# Altium PCB 驱动.PcbDoc
Units mil, origin at the board's own origin, x right, y up, seen from the top; angles counter-clockwise.
Board outline 2135 x 1890 mil, 2 copper layers (Top Layer, Bottom Layer); 35 components, 26 nets, 103 pads, 5 vias.
Unrouted connection lines stored in the file: 12.
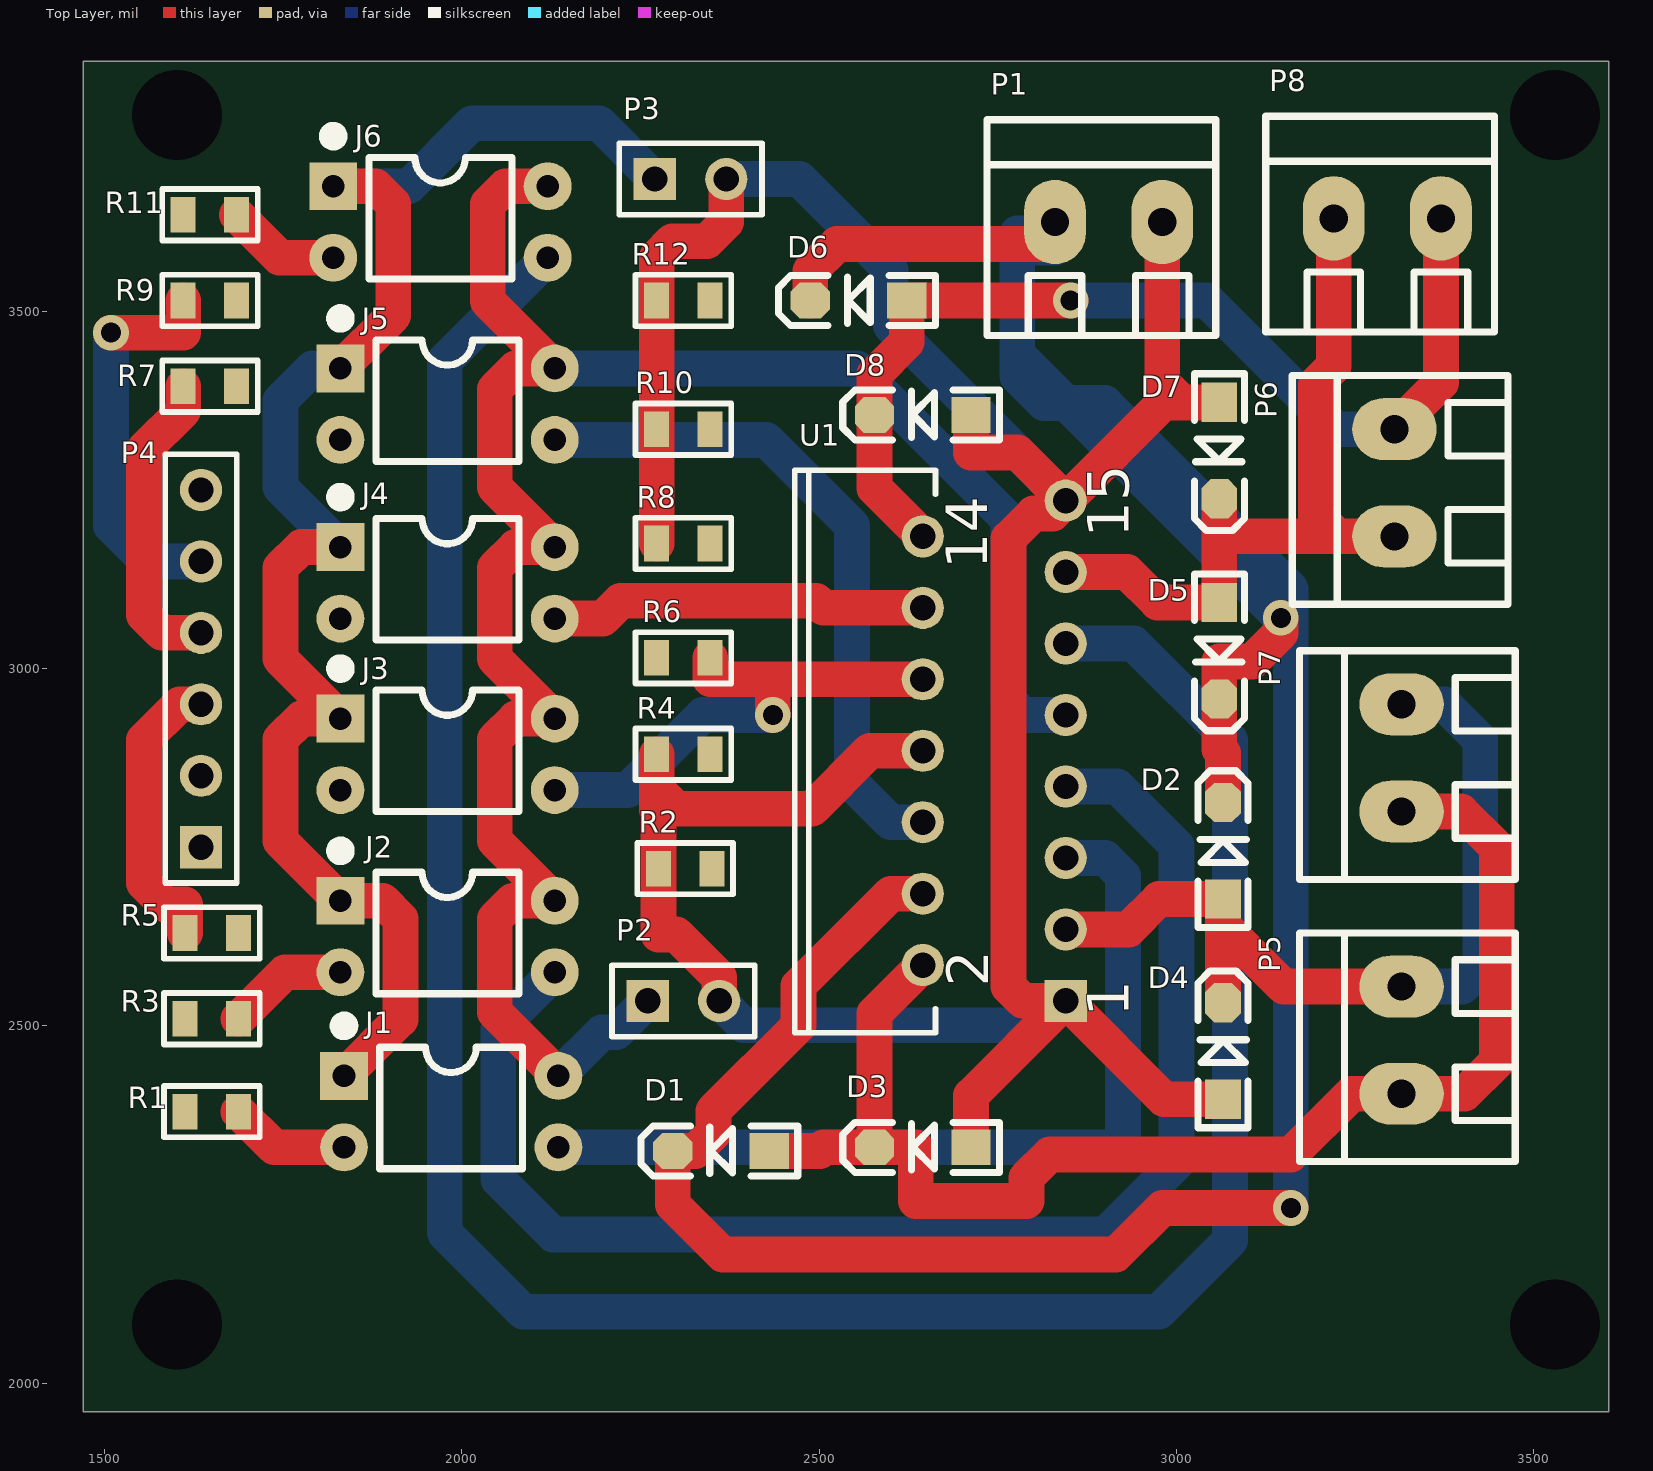
[diagram p0: Top Layer view]
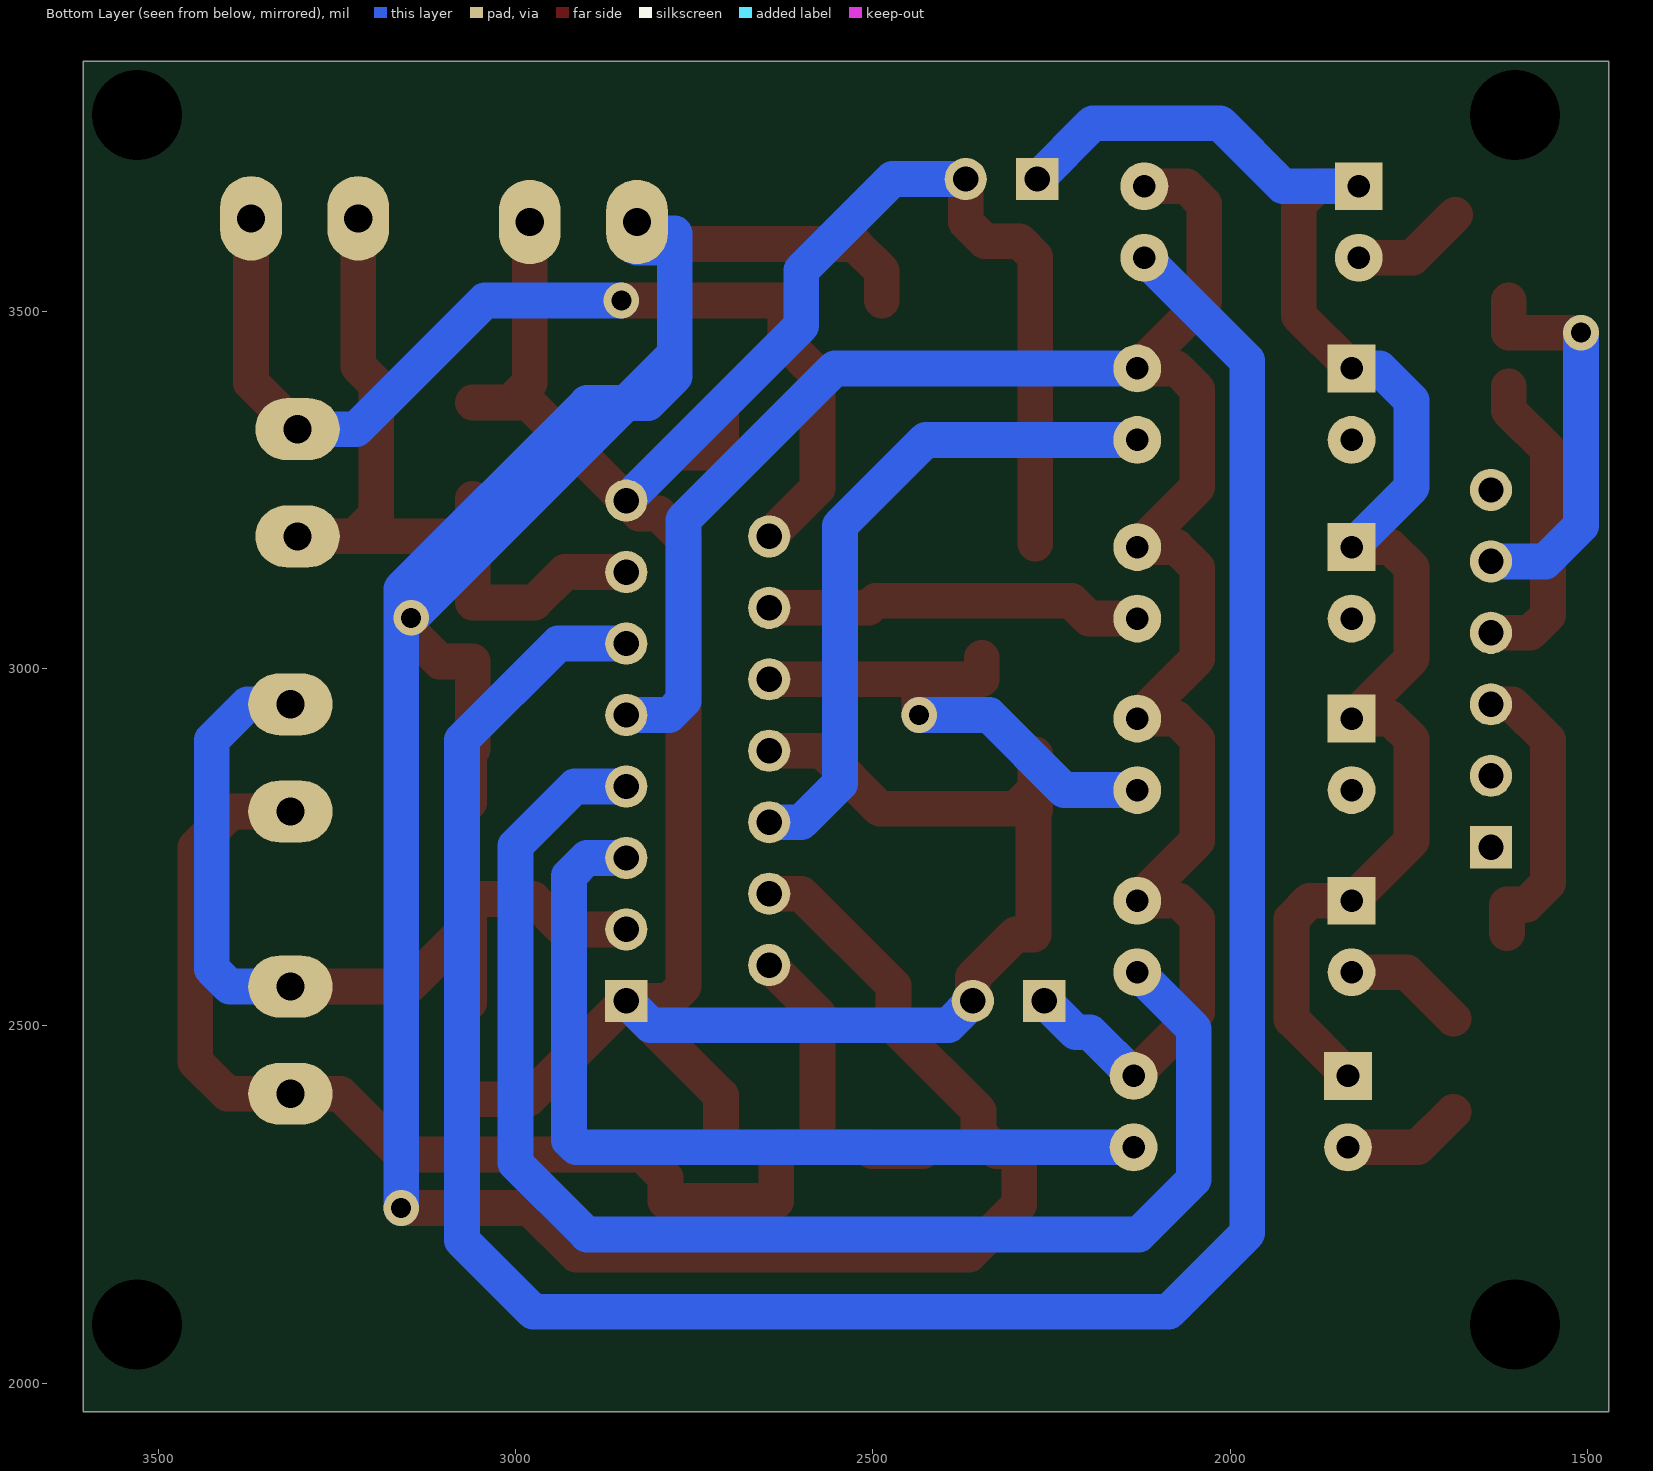
[diagram p1: Bottom Layer view, seen from below]

## Layer stack, top to bottom
Top Solder: solder mask 0.4, Solder Resist, Dk 3.5
Top Layer: signal copper 1.4
Dielectric 1: dielectric 12.6, FR-4, Dk 4.8
Bottom Layer: signal copper 1.4
Bottom Solder: solder mask 0.4, Solder Resist, Dk 3.5

## Board outline
1470,1960 3605,1960 3605,2505 3605,3405 3605,3850 1470,3850

## Design rules (kind name [scope] priority, off if disabled: settings)
Clearance [All] p1: gap=25 ignorepadtopadclearanceinfootprint=FALSE
PolygonConnect [All] p1: connectstyle=Relief reliefconductorwidth=10 reliefentries=4 polygonreliefangle="90 Angle" airgapwidth=10
RoutingVias [All] p1: holewidth=28 width=50 viastyle="Through Hole" minholewidth=28 minwidth=50 maxholewidth=28 maxwidth=50
SolderMaskExpansion [All] p1: expansion=4
Width [All] p1: maxlimit=80 minlimit=30 preferedwidth=50
30 further rules are at their usual default settings.

## Components (designator, comment, footprint, x,y, rotation, side; value= is the part's Value field where it differs from the comment)
D1 "1N4007" SOD-123 2362.5,2325 r180 top
D2 "1N4007" SOD-123 3065,2745 r90 top
D3 "1N4007" SOD-123 2645,2330 r180 top
D4 "1N4007" SOD-123 3065,2465 r90 top
D5 "1N4007" SOD-123 3060,3025 r270 top
D6 "1N4007" SOD-123 2555,3515 r180 top
D7 "1N4007" SOD-123 3060,3305 r270 top
D8 "1N4007" SOD-123 2645,3355 r180 top
J1 "TLP521-1" DIP4-300 1985,2380 r0 top
J2 "TLP521-1" DIP4-300 1980,2625 r0 top
J3 "TLP521-1" DIP4-300 1980,2880 r0 top
J4 "TLP521-1" DIP4-300 1980,3120 r0 top
J5 "TLP521-1" DIP4-300 1980,3370 r0 top
J6 "TLP521-1" DIP4-300 1970,3625 r0 top
P1 "HDR-1X2" KF128-3.81-2P 2905,3625 r0 top
P2 "HDR-1X2" HDR1X2 2260,2535 r0 top
P3 "HDR-1X2" HDR1X2 2270,3685 r0 top
P4 "HDR-1X6" HDR1X6 1635,2750 r90 top
P5 "HDR-1X2" KF128-3.81-2P 3315,2480 r90 top
P6 "HDR-1X2" KF128-3.81-2P 3305,3260 r90 top
P7 "HDR-1X2" KF128-3.81-2P 3315,2875 r90 top
P8 "HDR-1X2" KF128-3.81-2P 3295,3630 r0 top
R1 "1K" "R 0805_L" 1650,2380 r0 top
R2 "1K" "R 0805_L" 2312.4,2720 r0 top
R3 "1K" "R 0805_L" 1650,2510 r0 top
R4 "1K" "R 0805_L" 2310,2880 r0 top
R5 "1K" "R 0805_L" 1650,2630 r0 top
R6 "1K" "R 0805_L" 2310,3015 r0 top
R7 "1K" "R 0805_L" 1647.4,3395 r0 top
R8 "1K" "R 0805_L" 2310,3175 r0 top
R9 "1K" "R 0805_L" 1647.4,3515 r0 top
R10 "1K" "R 0805_L" 2310,3335 r0 top
R11 "1K" "R 0805_L" 1647.4,3635 r0 top
R12 "1K" "R 0805_L" 2310,3515 r0 top
U1 "L298N" Multiwatt15-V 2745,2885 r90 top

## Footprints (in the part's own frame and the unit in brackets; to place one, negate y for a bottom-side part, rotate by r counter-clockwise, add the part's x,y. Pads: shape width x height; smd on the part's side, far side on the other; paste and mask are expansions set on the pad)
DIP4-300 [mm] "4.6*7.6*3.8(长宽高）"
  rect 1.7x1.7 hole 0.8: 1(-3.81,1.27)
  round 1.7 hole 0.8: 2(-3.81,-1.27) 3(3.81,-1.27) 4(3.81,1.27)
  silkscreen extent -4.06,-2.03 2.54,3.3, body extent -3.93,-2.29 3.94,2.29, height 4.5
HDR1X2 [mm] "Connector; Header; 2 Position"
  rect 1.5x1.5 hole 0.9: 1(0,0)
  round 1.5 hole 0.9: 2(2.54,0)
  silkscreen extent -1.27,-1.27 3.81,1.27
HDR1X6 [mm] "Connector; Header; 6 Position"
  rect 1.5x1.5 hole 0.9: 1(0,0)
  round 1.5 hole 0.9: 2(2.54,0) 3(5.08,0) 4(7.62,0) 5(10.16,0) 6(12.7,0)
  silkscreen extent -1.27,-1.27 13.97,1.27
KF128-3.81-2P [mm] "螺钉式接线端子，脚距3.81mm"
  oval 2.2x3 hole 1: 1(-1.905,0) 2(1.905,0)
  silkscreen extent -4.32,-4.04 3.81,3.63, body extent -4.31,-3.9 3.81,3.5, height 8.55
Multiwatt15-V [mm]
  rect 1.5x1.5 hole 0.9: 1(-8.89,-2.54)
  round 1.5 hole 0.9: 2(-7.62,2.54) 3(-6.35,-2.54) 4(-5.08,2.54) 5(-3.81,-2.54) 6(-2.54,2.54) 7(-1.27,-2.54) 8(0,2.54) 9(1.27,-2.54) 10(2.54,2.54) 11(3.81,-2.54) 12(5.08,2.54) 13(6.35,-2.54) 14(7.62,2.54) 15(8.89,-2.54)
  silkscreen extent -10.03,2.09 9.97,7.09, body extent -9.83,-3.03 9.77,6.86, height 20.3
"R 0805_L" [mil] "1/8W贴片电阻"
  rect 35x50 smd: 1(-37.4,0) 2(37.4,0)
  silkscreen extent -67,-36 67,36, body extent -39,-25 39,25, height 20
SOD-123 [mil] "2.7x1.6X1.1mm（长宽高，不包括引脚） 淘宝ID:黄晶宝石"
  rect 55x50 smd: 1(-67.5,0)
  oct 55x50 smd: 2(67.5,0)
  silkscreen extent -108,-35 112,35, body extent -73,-31 73,31, height 48

## Part data
D1 D2 D3 D4 D5 D6 D7 D8: "整流二极管"
J1 J2 J3 J4 J5 J6: "1路开关光耦"
P1 P2 P3 P5 P6 P7 P8: library part "Header 2", "2P接插件"
  P2 P3: BOM名称=2P接插件, 技术支持，联系售后=https://shop463601444.taobao.com, 版权归属="封装库来自淘宝 ID：黄晶宝石"
P4: library part "Header 6", "6P接插件", BOM名称=6P接插件, 学习资源=https://shop463601444.taobao.com, 版权归属="封装库来自淘宝 ID：黄晶宝石"
R1 R2 R3 R4 R5 R6 R7 R8 R9 R10 R11 R12: library part R, "贴片电阻"

## Free pads (board coordinates)
  round 4 hole 125.98 unplated: 16(3530,2082) 17(3530,3775) 19(1601,2082) 20(1601,3775)

## Via types
v1: diameter 50, hole 28, Top Layer to Bottom Layer, 5 vias

## Nets (pads, with @x,y where several pads share a name; then routed paths per layer and width w, separated by ;. In a path a pad name is that pad's centre, name@x,y a point inside that pad or via, vN(x,y) a via of type N, cw(c..) or ccw(c..) an arc to the next point about the centre after c; other vN are vias at no path point)
+3.3V: J1.1 J2.1 J3.1 J4.1 J5.1 J6.1 P3.1 | length 2261.9
  Top Layer w50: J6.1 1879,3675 1904,3650 1904,3494 J5.1 ; J4.1 1775,3170 1746,3141 1746,3014 J3.1 1775,2930 1746,2901 1746,2759 J2.1 1889,2675 1914,2650 1914,2509 J1.1
  Bottom Layer w50: J6.1 1926,3675 2014,3763 2192,3763 P3.1 ; J4.1 1746,3254 1746,3375 1791,3420 J5.1
+5V: J1.4 J2.4 J3.4 J4.4 J5.4 J6.4 P2.1 U1.9 | length 2997.5
  Top Layer w50: J6.4 2061,3675 2036,3650 2036,3514 J5.4 2075,3420 2046,3391 2046,3254 J4.4 2075,3170 2046,3141 2046,3014 J3.4 2075,2930 2046,2901 2046,2759 J2.4 2071,2675 2046,2650 2046,2519 J1.4
  Bottom Layer w50: J5.4 2553,3420 2765,3208 2765,2955 2785,2935 U1.9 ; J1.4 2196,2491 2216,2491 P2.1
GND: D3.1 D4.1 D7.1 D8.1 P1.2 P2.2 P3.2 R2.1 R4.1 R6.1 R8.1 R10.1 R12.1 U1.1 U1.8 U1.15 | length 4714.7
  Top Layer w50: R4.1 2272.6,2831.4 ; R8.1 R10.1 R12.1 2272.6,3576 2294.6,3598 2343,3598 2370,3625 P3.2 ; P2.2 2360,2568 2300,2628 2275,2628 R2.1 2275,2800 2272.6,2802.4 2272.6,2831.4 ; U1.8 2571,2885 2490,2804 2300,2804 2272.6,2831.4 ; D3.1 2712.5,2402.5 U1.1 ; D8.1 2712.5,3302.5 2777.5,3302.5 U1.15 ; P1.2 2980,3400 3007.5,3372.5 ; D7.1 3007.5,3372.5 ; D4.1 2982.5,2397.5 U1.1 ; U1.1 2785,2535 2765,2555 2765,3182 2800,3217 2827,3217 U1.15 ; U1.15 2982.5,3372.5 3007.5,3372.5
  Bottom Layer w50: P2.2 2394,2501 2811,2501 U1.1 ; P3.2 2472.5,3685 2600.16,3557.35 2600.16,3479.84 U1.15
L1—1: D1.1 D3.2 P5.1 P7.1 U1.2 | length 1931.6
  Top Layer w50: D1.1 2501,2325 2506,2330 D3.2 ; U1.2 2577.5,2517.5 D3.2 ; P7.1 3398,2800 3448,2750 3448,2450 3403,2405 P5.1 3245,2405 3160,2320 2822.5,2320 2790,2287.5 2790,2255 2635,2255 2635,2330 D3.2
L1—2: D2.1 D4.2 P5.2 P7.2 U1.3 | length 1238.9
  Top Layer w50: U1.3 2933,2635 2975.5,2677.5 D2.1 3065,2640 ; D4.2 3065,2640 ; P5.2 3150,2555 3065,2640
  Bottom Layer w50: P5.2 3400,2555 3425,2580 3425,2900 3375,2950 P7.2
MT—A—EN: P4.5 R9.1 | length 562.7
  Top Layer w50: v1(1509,3470) 1610,3470 R9.1
  Bottom Layer w50: v1(1509,3470) 1509,3200 1559,3150 P4.5
MT—A—EN—: J5.3 R10.2 U1.6 | length 948.1
  Bottom Layer w50: J5.3 2426,3320 2546,3200 2546,2839 2600,2785 U1.6
MT—B—EN: P4.6 R11.1
MT—B—EN—: J6.3 R12.2 U1.11 | length 3596.6
  Bottom Layer w50: J6.3 1976,3431 1976,2210 2086,2100 2975,2100 3075,2200 3075,2900 2940,3035 U1.11
NetJ1_2: J1.2 R1.2 | length 168.3
  Top Layer w50: R1.2 1737.39,2330 J1.2
NetJ2_2: J2.2 R3.2 | length 169.5
  Top Layer w50: R3.2 1752.4,2575 J2.2
NetJ3_2: J3.2 R5.2
NetJ4_2: J4.2 R7.2
NetJ5_2: J5.2 R9.2
NetJ6_2: J6.2 R11.2 | length 160
  Top Layer w50: R11.2 1744.8,3575 J6.2
"PWM A—1": P4.1 R1.1
"PWM A—1—": J1.3 R2.2 U1.5 | length 1254.5
  Bottom Layer w50: J1.3 2915,2330 2925,2340 2925,2710 2900,2735 U1.5
"PWM A—2": P4.2 R3.1
"PWM A—2—": J2.3 R4.2 U1.7 | length 1978.4
  Bottom Layer w50: J2.3 2051,2496 2051,2285 2128,2208 2900,2208 3000,2308 3000,2752 2917,2835 U1.7
"PWM B—1": P4.3 R5.1 | length 410.7
  Top Layer w50: R5.1 1612.6,2670 1585,2670 1555,2700 1555,2900 1605,2950 P4.3
"PWM B—1—": J3.3 R6.2 U1.10 | length 726.1
  Top Layer w50: R6.2 2347.4,2985 2435,2985 ; v1(2435,2935) 2435,2985 ; U1.10 2435,2985
  Bottom Layer w50: J3.3 2232,2830 2337,2935 v1(2435,2935)
"PWM B—2": P4.4 R7.1 | length 433.1
  Top Layer w50: R7.1 1610,3361 1555,3306 1555,3075 1580,3050 P4.4
"PWM B—2—": J4.3 R8.2 U1.12 | length 529.5
  Top Layer w50: J4.3 2197,3070 2222,3095 2496,3095 2506,3085 U1.12
R1—1: D5.1 D7.2 P6.1 P8.1 U1.13 | length 1090.4
  Top Layer w50: U1.13 2931,3135 2973.5,3092.5 D5.1 3060,3185 ; D7.2 3060,3185 ; P8.1 3220,3423 3195,3398 3195,3215 3225,3185 ; P6.1 3225,3185 ; 3060,3185 3225,3185
R1—2: D6.1 D8.2 P6.2 P8.2 U1.14 | length 1455.6
  Top Layer w50: U1.14 2577.5,3252.5 D8.2 2577.5,3412 2622.5,3457 D6.1 v1(2852,3515) ; P6.2 3370,3400 P8.2
  Bottom Layer w50: v1(2852,3515) 3043,3515 3223,3335 P6.2
VCC: D1.2 D2.2 D5.2 D6.2 P1.1 U1.4 | length 4536.2
  Top Layer w50: D6.2 2487.5,3556.5 2525,3594 2830,3594 P1.1 ; U1.4 2600,2685 2471,2556 2471,2500 2352,2381 2352,2350 2327,2325 D1.2 2295,2250 2365,2180 2915,2180 2980,2245 v1(3160,2245) ; D2.2 3065,2882 3060,2887 D5.2 3060,3010 3106,3010 3146,3050 v1(3146,3071)
  Bottom Layer w50: P1.1 P1.1@2830,3609 ; v1(3146,3071) 2845.5,3371.5 ; v1(3160,2245) 3160,3111.5 2900,3371.5 2845.5,3371.5 ; 2777,3440 2777,3409.07 2814.56,3371.5 2845.5,3371.5 ; 2777,3440 2845.5,3371.5 ; 2777,3440 2777,3589 ; 2777,3589 2830,3589 P1.1@2830,3609 ; 2777,3589 2777,3609 P1.1@2830,3609

## Polygon pours and split planes (outlines as drawn)
no net on Drill Drawing (solid): 1470,3850 1470,1960 3605,1960 3605,3850

## Silkscreen, mask and mechanical layers (free items; w line width, h text height)
Drill Drawing:
  lines w10: 1470,1960 3605,1960 3605,2030 3605,2505 3605,3405 3605,3850 1470,3850 1470,1960

## Text inside footprints (layer, text, board x,y; h text height)
U1: Top Overlay "15" at 2953,3183 h100 r90; Top Overlay "1" at 2953,2513 h100 r90; Top Overlay "14" at 2755,3139 h100 r90; Top Overlay "2" at 2756,2555 h100 r90